# EAGLE board nokia-phone-arduino-shield (EAGLE 6.5.0)
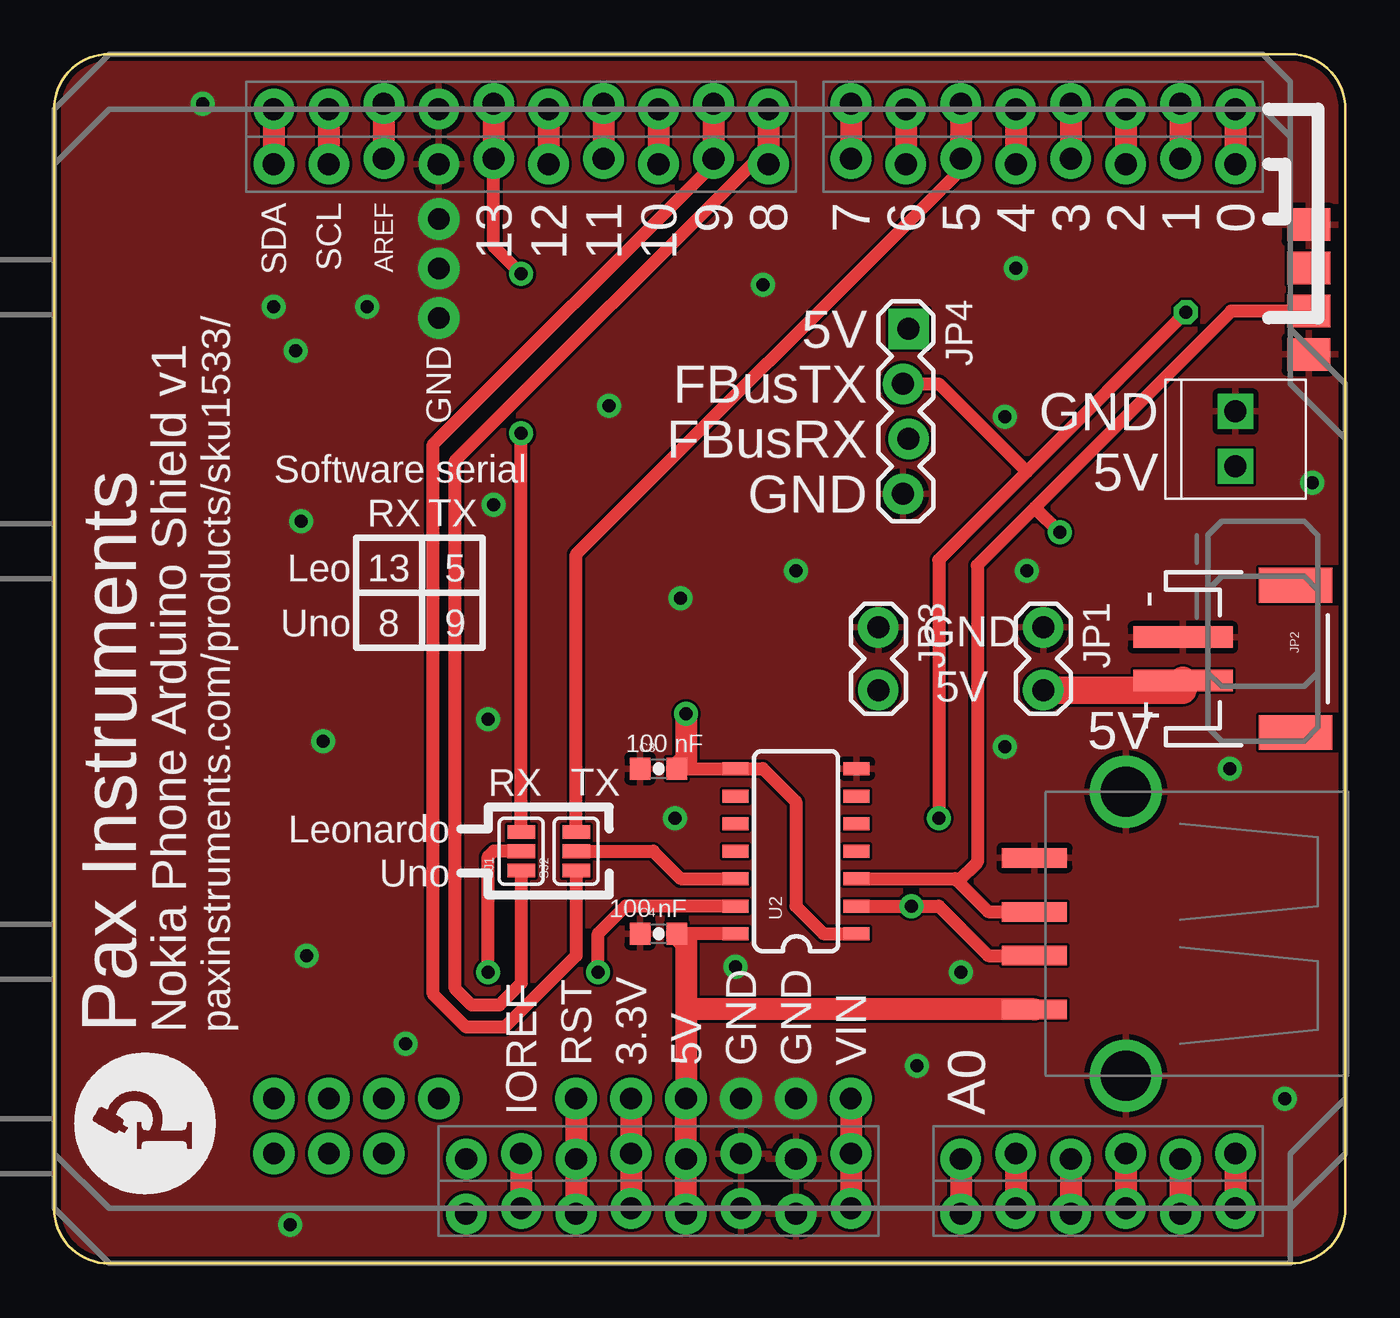
[diagram p0: board, top side]
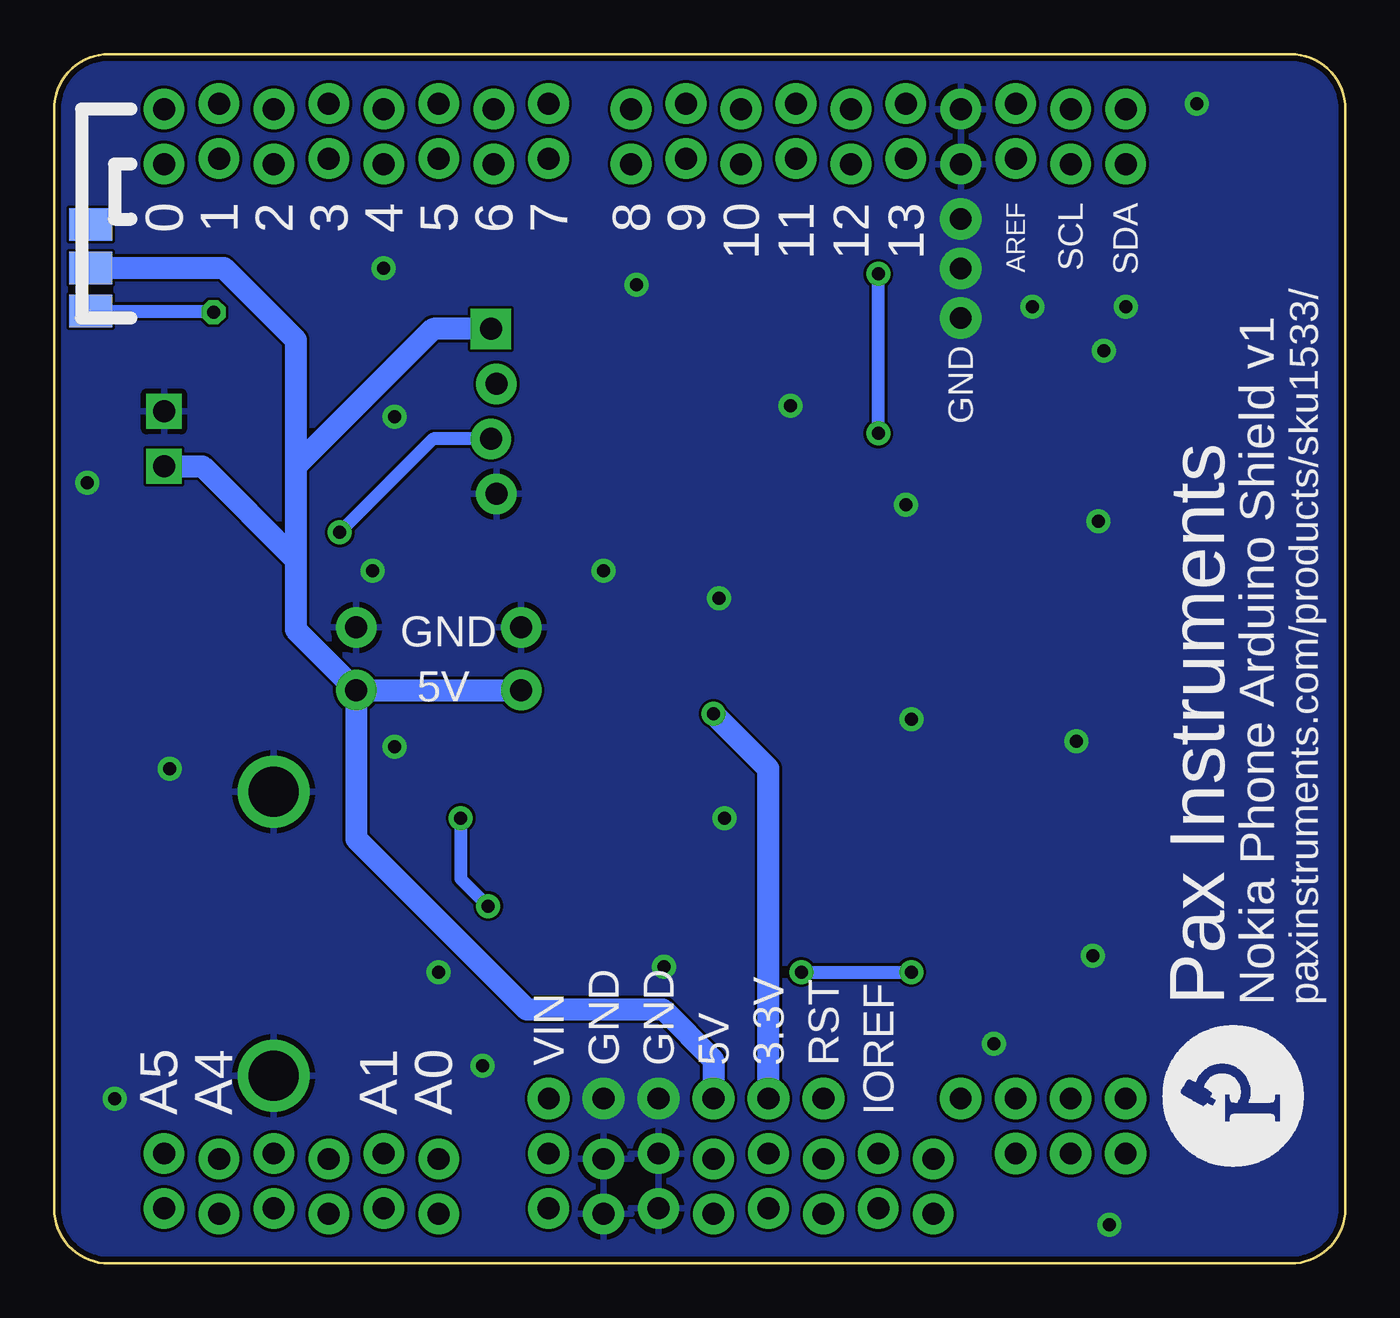
[diagram p1: board, bottom side, seen from below]

Size 59.69 x 55.88 mm. Coordinates in mm from the lower left corner, seen from the top.
Outline: 57.15,0 2.54,0 arc-90 0,2.54 0,53.34 arc-90 2.54,55.88 57.15,55.88 arc-90 59.69,53.34 59.69,2.54 arc-90 57.15,0
Copper layers (1*16): Top 0.035mm / dielectric 1.5mm / Bottom 0.035mm
Design rules "PaxInstrument-T400 *": minimum track width 6mil, minimum drill 13mil, track to track 5mil, track to pad 5mil, pad to pad 5mil, via to via 5mil, smd to smd 5mil, copper to edge 10mil, drill to drill 8mil, minimum pad ring 12mil, minimum via ring 10mil, stop-mask expansion 4mil, vias tented up to drill 25mil, thermal gap 10mil
Net classes: 0 default: width 0.203 mm, drill 0.33 mm; 1 power: width 0.305 mm

## Footprints (pad centres in the part's own frame; a part is rotated, then mirrored left to right if it is on the bottom)
SPARKFUN-CAPACITORS_0603-CAP = smd 0.94 x 1.016: 1 -0.85,0; 2 0.85,0
UNO_R3_SHIELD_NOLABELS_LOCK = drill 1.016 pad 1.88: 3.3V 50.8,26.67; 5V 51.054,29.21; A0 51.054,41.91; A1 50.8,44.45; A2 51.054,46.99; A3 50.8,49.53; A4 51.054,52.07; A5 50.8,54.61; AREF 2.286,15.24; D2 2.54,49.53; D3 2.286,46.99; D4 2.54,44.45; D5 2.286,41.91; D6 2.54,39.37; D7 2.286,36.83; D8 2.54,33.02; D9 2.286,30.48; D10 2.54,27.94; D11 2.286,25.4; D12 2.54,22.86; D13 2.286,20.32; GND@0 50.8,31.75; GND@1 51.054,34.29; GND@2 2.54,17.78; IOREF 50.8,21.59; NC 51.054,19.05; RES 51.054,24.13; RX 2.54,54.61; SCL 2.54,10.16; SDA 2.54,12.7; TX 2.286,52.07; VIN 50.8,36.83
1X02_LOCK = drill 1.016 pad 1.88: 1 -0.178,0; 2 2.718,0
JST-2-SMD = smd 1 x 4.6: 1 -1,-3.7; 2 1,-3.7 | smd 1.6 x 3.4: NC1 -3.4,1.5; NC2 3.4,1.5
1X04_LOCK = drill 1.016 pad 1.88 square: 1 0,0.127 | drill 1.016 pad 1.88: 2 2.54,-0.127; 3 5.08,0.127; 4 7.62,-0.127
1X02_2.54_SCREWTERM = drill 1.016 square: P1 2.54,0; P2 0,0
PAD-1.5X4.5 = smd 1.5 x 2: P$1 0,0
SJ_3 = smd 0.635 x 1.27: 1 -0.889,0; 2 0,0; 3 0.889,0
SO14 = smd 0.6 x 1.2: 1 -3.81,-2.8; 2 -2.54,-2.8; 3 -1.27,-2.8; 4 0,-2.8; 5 1.27,-2.8; 6 2.54,-2.8; 7 3.81,-2.8; 8 3.81,2.8; 9 2.54,2.8; 10 1.27,2.8; 11 0,2.8; 12 -1.27,2.8; 13 -2.54,2.8; 14 -3.81,2.8
USB-A-S-NOSILK-FEMALE = smd 3 x 0.9: D+ 4.212,-1; D- 4.212,1; GND 4.212,-3.5; VBUS 4.212,3.5 | drill 2.311: S1 0,-6.566; S2 0,6.566

## Placement (x,y rotation side)
C3  100nF  [SPARKFUN-CAPACITORS_0603-CAP]  27.94,22.86 0 top
C4  100nF  [SPARKFUN-CAPACITORS_0603-CAP]  27.94,15.24 0 top
J1  ARDUINO_R3_SHIELD  [UNO_R3_SHIELD_NOLABELS_LOCK]  0,55.88 270 top
J3  ARDUINO_R3_SHIELD  [UNO_R3_SHIELD_NOLABELS_LOCK]  0,53.34 270 top
JP1  [1X02_LOCK]  45.72,29.21 270 top
JP2  [JST-2-SMD]  55.88,27.94 270 top
JP3  [1X02_LOCK]  38.1,29.21 270 top
JP4  [1X04_LOCK]  39.37,43.18 270 top
JP5  [1X02_2.54_SCREWTERM]  54.61,36.83 90 top
POP2  [PAD-1.5X4.5]  58,48 90 top
POP3  [PAD-1.5X4.5]  58,48 90 bottom
POP4  [PAD-1.5X4.5]  58,46 90 top
POP5  [PAD-1.5X4.5]  58,46 90 bottom
POP6  [PAD-1.5X4.5]  58,44 270 top
POP7  [PAD-1.5X4.5]  58,44 90 bottom
POP8  [PAD-1.5X4.5]  58,42 90 top
SJ1  [SJ_3]  21.59,19.05 90 top
SJ2  [SJ_3]  24.13,19.05 90 top
U2  [SO14]  34.29,19.05 90 top
U$1  [PAXINSTRUMENT_LOGO]  1.78,4.32 90 bottom
U$2  USB+SHIELDUSB-A-S-NOSILK-FEMALE  [USB-A-S-NOSILK-FEMALE]  49.53,15.24 180 top
U$6  [PAXINSTRUMENT_LOGO]  7.62,3.05 90 top

## Library data of the parts
C3 C4 = PaxInstrument-T400; MPN: CL10B104KO8NNNC; OC_DIGIKEY: 1276-1005-2-ND
J1 J3 = SparkFun-Boards
JP1 JP3-JP5 POP2-POP8 U$2 = SparkFun-Connectors
JP2 = SparkFun-Connectors; PROD_ID: CONN-11443
SJ1 SJ2 = SparkFun-Retired
U2 = SparkFun-DigitalIC; MPN: TXB0104DR; OC_DIGIKEY: 296-21928-2-ND; PROD_ID: IC-11329
U$1 U$6 = PaxInstrument-T400

## Nets
3.3V: C3.2 J1.3.3V J3.3.3V U2.1 U2.8
5V: C4.2 J1.5V J3.5V JP1.2 JP2.2 JP3.2 JP4.1 JP5.P2 POP5.P$1 U2.14 U$2.VBUS
A0: J1.A0 J3.A0
A1: J1.A1 J3.A1
A2: J1.A2 J3.A2
A3: J1.A3 J3.A3
A4: J1.A4 J3.A4
A5: J1.A5 J3.A5
ARDUINO_RX: SJ1.2 U2.13
ARDUINO_TX: SJ2.2 U2.12
AREF: J1.AREF J3.AREF
D0: J1.RX J3.RX
D1: J1.TX J3.TX
D2: J1.D2 J3.D2
D3: J1.D3 J3.D3
D4: J1.D4 J3.D4
D5: J1.D5 J3.D5 SJ2.3
D6: J1.D6 J3.D6
D7: J1.D7 J3.D7
D8: J1.D8 J3.D8 SJ1.1
D9: J1.D9 J3.D9 SJ2.1
D10: J1.D10 J3.D10
D11(MOSI): J1.D11 J3.D11
D12(MISO): J1.D12 J3.D12
D13(SCK): J1.D13 J3.D13 SJ1.3
FBUS_RX: JP4.3 POP6.P$1 U2.3 U$2.D+
FBUS_TX: JP4.2 POP7.P$1 U2.2 U$2.D-
GND: C3.1 C4.1 J1.GND@0 J1.GND@1 J1.GND@2 J3.GND@0 J3.GND@1 J3.GND@2 JP1.1 JP2.1 JP3.1 JP4.4 JP5.P1 POP2.P$1 POP8.P$1 U2.7 U$2.GND U$2.S1 U$2.S2
IOREF: J1.IOREF J3.IOREF
N$218: POP4.P$1
RESET: J1.RES J3.RES
SCL: J1.SCL J3.SCL
SDA: J1.SDA J3.SDA
VIN: J1.VIN J3.VIN

## Tracks (layer width: path | path; a pad name or v marks a point on that pad's centre or on a via)
3.3V  (via drill 0.6, 1 pad 1.93)
  Top 0.61: C3.2 U2.8 32.77,22.86 34.29,21.34 34.29,16.51 35.56,15.24 U2.1
  Top 1.016: v26.67,7.62 J1.3.3V J3.3.3V | v29.21,25.4 29.21,23.28 C3.2
  Bottom 1.016: v26.67,7.62 26.67,22.86 v29.21,25.4
5V  (via drill 1 pad 1.93)
  Top 0.61: U2.14 C4.2
  Top 1.016: J3.5V J1.5V v29.21,7.62 29.21,11.94 | C4.2 29.21,14.82 29.21,11.94 | U$2.VBUS 29.41,11.74 29.21,11.94
  Top 1.27: JP1.2 52.18,26.49 JP2.2
  Bottom 1.016: POP5.P$1 51.84,46 48.51,42.67 48.51,36.83 | 48.51,36.83 48.51,32.51 | 48.51,32.51 48.51,29.29 JP1.2 | JP1.2 45.72,19.61 37.85,11.74 31.55,11.74 29.21,9.4 v29.21,7.62 | JP1.2 JP3.2 | JP4.1 42.16,43.18 48.51,36.83 | JP5.P2 52.83,36.83 48.51,32.51
A0
  Top 1.016: J1.A0 J3.A0
A1
  Top 1.016: J1.A1 J3.A1
A2
  Top 1.016: J1.A2 J3.A2
A3
  Top 1.016: J1.A3 J3.A3
A4
  Top 1.016: J1.A4 J3.A4
A5
  Top 1.016: J1.A5 J3.A5
ARDUINO_RX  (via drill 0.6)
  Top 0.61: SJ1.2 20.32,19.05 20.07,18.8 v20.07,13.46 | U2.13 26.42,16.51 25.15,15.24 v25.15,13.46
  Bottom 0.61: v25.15,13.46 v20.07,13.46
ARDUINO_TX
  Top 0.61: SJ2.2 27.69,19.05 28.96,17.78 U2.12
AREF
  Top 1.016: J1.AREF J3.AREF
D0
  Top 1.016: J1.RX J3.RX
D1
  Top 1.016: J1.TX J3.TX
D2
  Top 1.016: J1.D2 J3.D2
D3
  Top 1.016: J1.D3 J3.D3
D4
  Top 1.016: J1.D4 J3.D4
D5
  Top 0.61: SJ2.3 24.13,32.77 41.91,50.55 J3.D5
  Top 1.016: J1.D5 J3.D5
D6
  Top 1.016: J1.D6 J3.D6
D7
  Top 1.016: J1.D7 J3.D7
D8
  Top 0.61: SJ1.1 21.59,12.95 20.57,11.94 19.3,11.94 18.54,12.7 18.54,37.08 33.02,51.56
  Top 1.016: J1.D8 33.02,51.56 J3.D8
D9
  Top 0.61: SJ2.1 24.13,14.22 20.83,10.92 19.05,10.92 17.53,12.45 17.53,37.85 30.48,50.8 J3.D9
  Top 1.016: J1.D9 J3.D9
D10
  Top 1.016: J1.D10 J3.D10
D11(MOSI)
  Top 1.016: J1.D11 J3.D11
D12(MISO)
  Top 1.016: J1.D12 J3.D12
D13(SCK)  (via drill 0.6)
  Top 0.61: SJ1.3 v21.59,38.35 | v21.59,45.72 20.32,46.99 J3.D13
  Top 1.016: J1.D13 J3.D13 20.32,50.8
  Bottom 0.61: v21.59,38.35 v21.59,45.72
FBUS_RX  (via drill 0.6)
  Top 0.61: U2.3 41.66,17.78 41.78,17.65 | 41.78,17.65 43.18,16.26 45.3,16.26 U$2.D+ | POP6.P$1 54.41,44 45.34,34.92 | 45.34,34.92 42.67,32.26 42.67,18.54 41.78,17.65 | v46.48,33.78 45.34,34.92
  Bottom 0.61: JP4.3 42.16,38.1 v46.48,33.78
FBUS_TX  (via drill 0.6)
  Top 0.61: U2.2 v39.62,16.51 40.89,16.51 43.18,14.22 45.3,14.22 U$2.D- | v52.32,43.94 44.96,36.58 | 44.96,36.58 40.89,32.51 v40.89,20.57 | JP4.2 40.89,40.64 44.96,36.58
  Bottom 0.61: POP7.P$1 52.38,44 v52.32,43.94 | v40.89,20.57 40.89,17.78 v39.62,16.51
GND  (via drill 0.6, 1 pad 1.93)
  other vias: 17.78,43.69 17.78,48.26 31.75,7.62 34.29,7.62 17.78,45.97 11.18,42.16 14.48,44.2 10.16,44.2 11.43,34.29 12.45,24.13 20.07,25.15 20.32,35.05 11.68,14.22 31.5,13.72 28.7,20.57 28.96,30.73 25.65,39.62 32.77,45.21 44.45,45.97 43.94,39.12 58.17,36.07 44.96,32 43.94,23.88 54.36,22.86 56.9,7.62 39.88,9.14 16.26,10.16 34.29,32 41.91,13.46 10.92,1.78 6.86,53.59
  pour Bottom: 59.69,55.88 59.69,0 0,0 0,55.88
  pour Top: 59.69,55.88 59.69,0 0,0 0,55.88
IOREF
  Top 1.016: J1.IOREF J3.IOREF
N$160  (via drill 1 pad 1.93)
  other vias: 10.16,7.62
N$161  (via drill 1 pad 1.93)
  other vias: 12.7,7.62
N$162  (via drill 1 pad 1.93)
  other vias: 15.24,7.62
N$163  (via drill 1 pad 1.93)
  other vias: 10.16,5.08
N$164  (via drill 1 pad 1.93)
  other vias: 12.7,5.08
N$165  (via drill 1 pad 1.93)
  other vias: 15.24,5.08
N$217  (via drill 1 pad 1.93)
  other vias: 17.78,7.62
RESET  (via drill 1 pad 1.93)
  Top 1.016: J3.RES J1.RES v24.13,7.62
SCL
  Top 1.016: J1.SCL J3.SCL
SDA
  Top 1.016: J1.SDA J3.SDA
VIN  (via drill 1 pad 1.93)
  Top 1.016: v36.83,7.62 J1.VIN J3.VIN

## Text on the board
tPlace: SDA | SCL | AREF | 13 | 12 | 11 | 10 | 9 | 8 | 7 | 6 | 5 | 4 | 3 | 2 | 1 | 0 | 5V | GND | FBusTX | GND | FBusRX | 5V | Software serial | GND | RX | TX | Leo | 13 | 5 | Uno | 8 | 9 | GND | 5V | 5V | 100 nF | RX | TX | Leonardo | Uno | 100 nF | Pax Instruments | Nokia Phone Arduino Shield v1 | paxinstruments.com/products/sku1533/ | RST | 3.3V | 5V | GND | GND | VIN | IOREF | A0
bPlace: SDA | SCL | AREF | 13 | 12 | 11 | 10 | 9 | 8 | 7 | 6 | 5 | 4 | 3 | 2 | 1 | 0 | GND | GND | 5V | paxinstruments.com/products/sku1533/ | Nokia Phone Arduino Shield v1 | Pax Instruments | RST | 3.3V | 5V | GND | GND | VIN | IOREF | A0 | A1 | A4 | A5